# Allegro board RGB24_TO_LVDS.brd
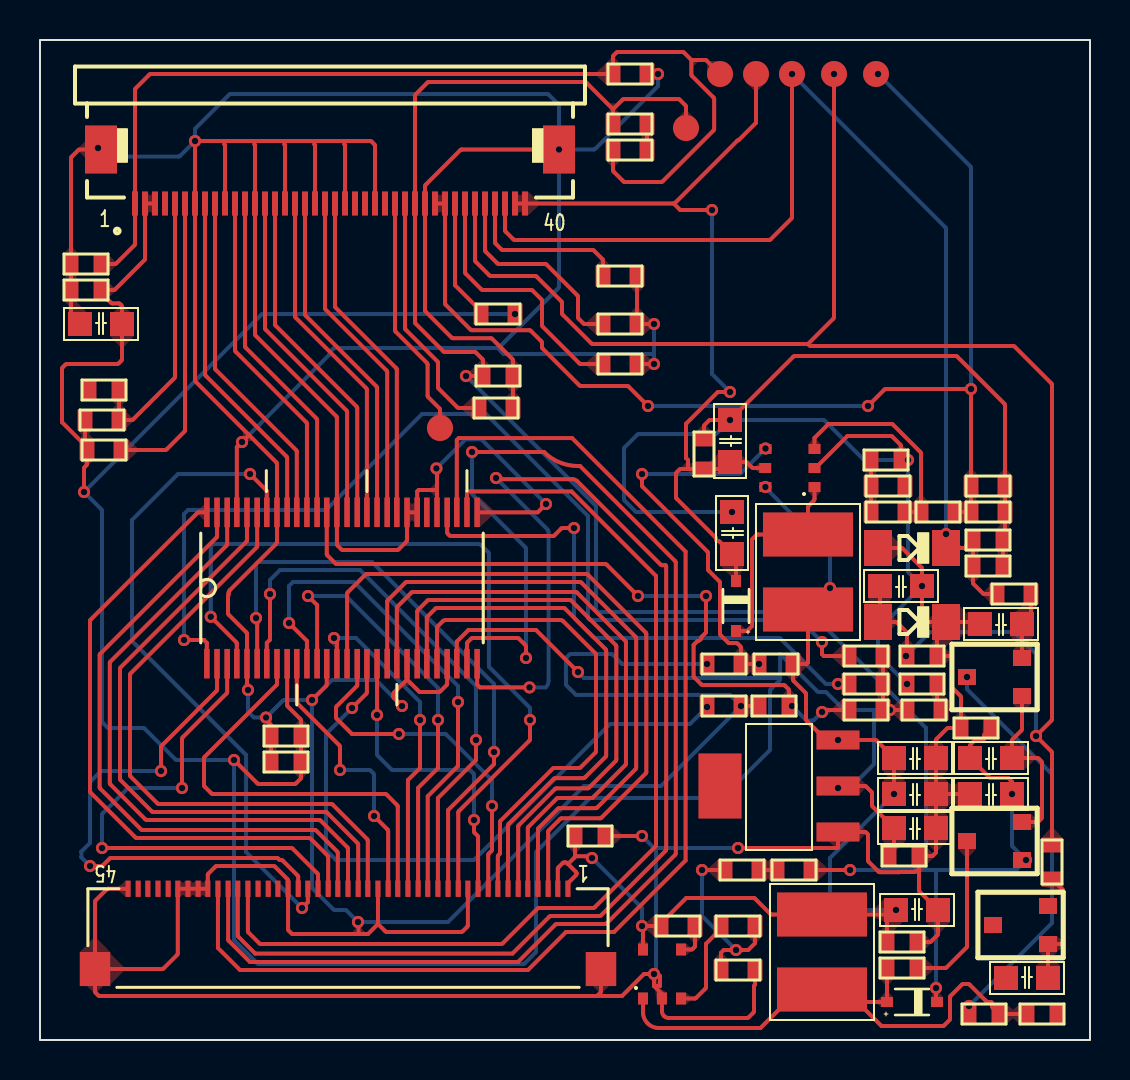
[diagram p0: board, top side]
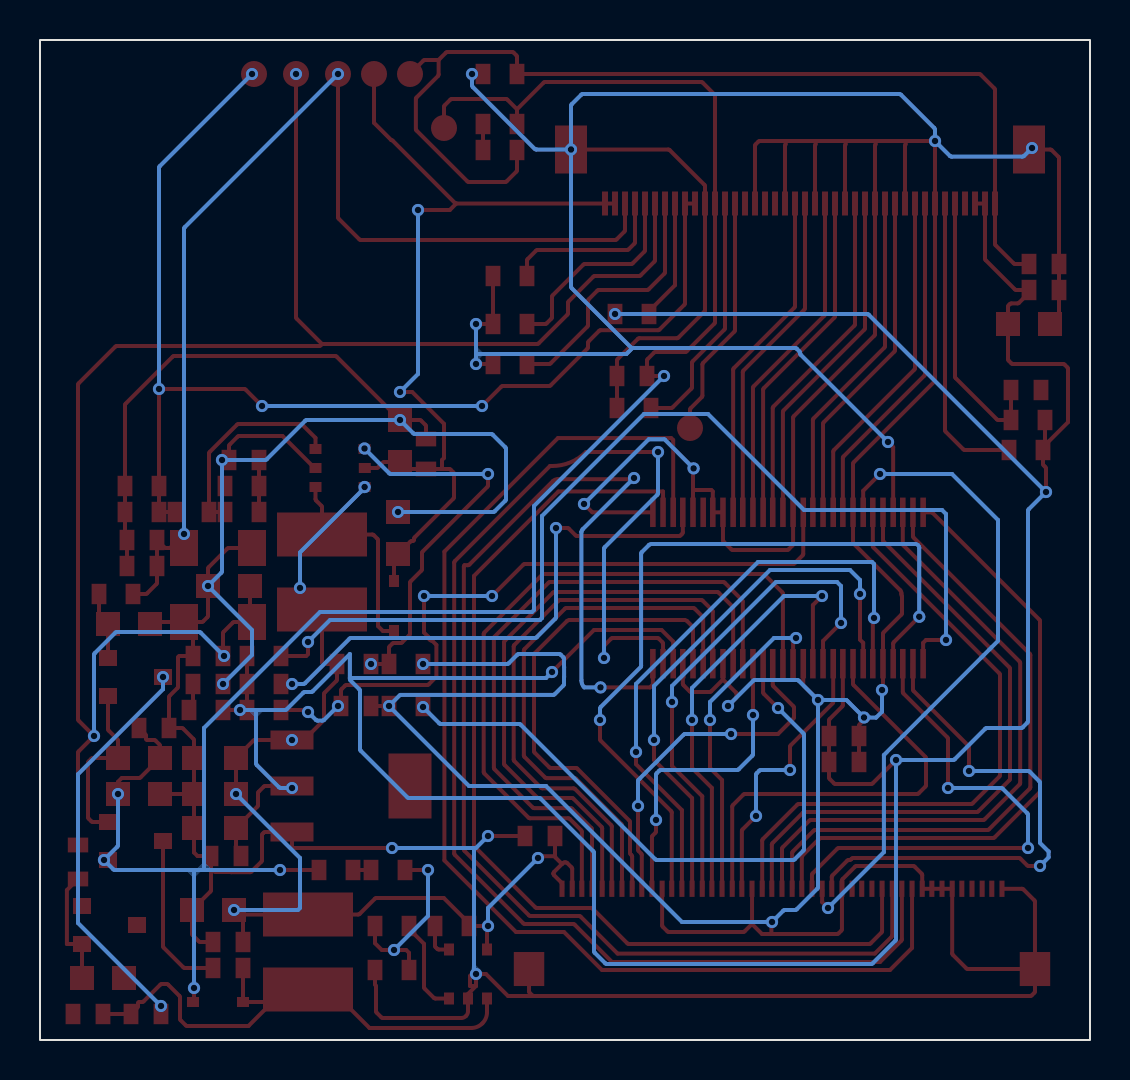
[diagram p1: board, bottom side, seen from below]

Outline 52.5 x 50 mm; copper layers: TOP, BOTTOM. Coordinates in mm from the lower left corner of the outline.
Outline path: rectangle 0,0 52.5,50

## Design rules (mm)
constraint set DEFAULT: 

## Placement (name value [footprint] x y rotation side)
C1  10uF  [CAP_SMD_0805]  4.1 35.8 180 top
C2  100nF  [CAP_SMD_0603]  2.3 37.5 180 top
C3  100nF  [CAP_SMD_0603]  2.3 38.8 180 top
C4  100nF  [CAP_SMD_0603]  3.2 32.5 180 top
C5  100nF  [CAP_SMD_0603]  12.3 15.2 180 top
C6  100nF  [CAP_SMD_0603]  12.3 13.9 180 top
C7  100nF  [CAP_SMD_0603]  44.1 17.8 180 top
C8  100nF  [CAP_SMD_0603]  36.7 16.7 180 top
C9  100nF  [CAP_SMD_0603]  22.9 33.2 0 top
C10  10uF  [CAP_SMD_0805]  42.7 12.3 0 top
C11  100nF  [CAP_SMD_0603]  27.5 10.2 0 top
C12  10uF  [CAP_SMD_0805]  42.7 10.6 0 top
C13  100nF  [CAP_SMD_0603]  43.2 9.2 0 top
C14  10uF  [CAP_SMD_0805]  50.4 3.1 180 top
C15  100nF  [CAP_SMD_0603]  47.2 1.3 180 top
C16  10uF  [CAP_SMD_0805]  42 22.7 0 top
C17  100nF  [CAP_SMD_0603]  44.1 19.2 0 top
C18  100nF  [CAP_SMD_0603]  50.1 1.3 0 top
C19  10uF  [CAP_SMD_0805]  47 20.8 0 top
C20  10uF  [CAP_SMD_0603]  47.4 25 180 top
C21  100nF  [CAP_SMD_0603]  47.4 23.7 180 top
C22  10uF  [CAP_SMD_0805]  42.7 14.1 0 top
C23  10uF  [CAP_SMD_0805]  34.6 24.3 90 top
C24  10uF  [CAP_SMD_0805]  34.5 28.9 90 top
C25  100nF  [CAP_SMD_0603]  43.1 3.6 0 top
C26  10uF  [CAP_SMD_0805]  46.5 14.1 0 top
C27  100nF  [CAP_SMD_0603]  42.3 29 0 top
C28  10uF  [CAP_SMD_0805]  44.9 6.5 180 top
C29  100nF  [CAP_SMD_0603]  43.1 4.9 180 top
C32  10uF  [CAP_SMD_0805]  46.5 12.3 0 top
C33  100nF  [CAP_SMD_0603]  46.8 15.6 0 top
C50  100nF  [CAP_SMD_0603]  33.2 29.3 270 top
D1  BAV99/SOT  [SOT23]  50.4 4.8 270 top
D2  6.8V  [SOD80C]  43.6 20.9 180 top
D3  5819  [SOD323]  34.8 21.7 270 top
D4  BAV99/SOT  [SOT23]  49.1 17.2 270 top
D5  20V  [SOD80C]  43.6 24.6 180 top
D6  BAV99/SOT  [SOT23]  49.1 9 270 top
D7  5819  [SOD323]  43.6 1.9 180 top
J2  nanopi_lcd_bus  [FPC45_0D5]  15.4 7 180 top
L1  4.7uH  [L52X58X45]  38.4 23.4 90 top
L2  -  [L52X58X45]  39.1 4.4 270 top
LCD1  HE070NA-13B-27HB  [FPC40_0D5]  14.5 42.4 180 top
R1  10K  [RES_SMD_0603]  3.2 29.5 180 top
R2  10K  [RES_SMD_0603]  3.1 31 180 top
R3  0R  [RES_SMD_0603]  41.3 16.5 0 top
R4  0R  [RES_SMD_0603]  44.2 16.5 180 top
R5  10K  [RES_SMD_0603]  41.3 19.2 0 top
R6  10K  [RES_SMD_0603]  41.3 17.8 0 top
R7  10K  [RES_SMD_0603]  22.9 36.3 0 top
R8  10K  [RES_SMD_0603]  34.2 16.7 180 top
R9  10K  [RES_SMD_0603]  29 35.8 180 top
R10  10K  [RES_SMD_0603]  29 38.2 180 top
R11  10K  [RES_SMD_0603]  29 33.8 180 top
R12  10K  [RES_SMD_0603]  22.8 31.6 180 top
R13  1.5K  [RES_SMD_0603]  48.7 22.3 180 top
R14  10K  [RES_SMD_0603]  36.8 18.8 0 top
R15  10K  [RES_SMD_0603]  44.9 26.4 180 top
R16  270R  [RES_SMD_0603]  50.6 8.9 90 top
R17  NC  [RES_SMD_0603]  34.2 18.8 180 top
R18  10K  [RES_SMD_0603]  42.4 26.4 0 top
R19  5R  [RES_SMD_0603]  47.4 26.4 180 top
R20  5R  [RES_SMD_0603]  47.4 27.7 180 top
R21  1K  [RES_SMD_0603]  42.4 27.7 0 top
R22  10K  [RES_SMD_0603]  31.9 5.7 0 top
R23  68K 1%  [RES_SMD_0603]  37.7 8.5 180 top
R24  33K 1%  [RES_SMD_0603]  29.5 45.8 180 top
R25  100K  [RES_SMD_0603]  34.9 5.7 180 top
R27  6.2K 1%  [RES_SMD_0603]  29.5 44.5 0 top
R32  10K 1%  [RES_SMD_0603]  35.1 8.5 180 top
R33  10K 1%  [RES_SMD_0603]  34.9 3.5 0 top
R34  18K 1%  [RES_SMD_0603]  29.5 48.3 180 top
TP1  DIMO  [TESTPOINTCIR]  20 30.6 0 top
TP2  VGH  [TESTPOINTCIR]  37.6 48.3 0 top
TP3  VGL  [TESTPOINTCIR]  39.7 48.3 0 top
TP4  AVDD  [TESTPOINTCIR]  32.3 45.6 0 top
TP5  VCOM  [TESTPOINTCIR]  34 48.3 0 top
TP6  LED-  [TESTPOINTCIR]  41.8 48.3 0 top
TP7  LED+  [TESTPOINTCIR]  35.8 48.3 0 top
U1  THC63LVDM83R  [TSSOP56]  15.1 22.6 90 top
U2  AMS1117-3.3  [SOT223]  37 12.6 90 top
U3  RT9293_TSOT-23-6  [SOT23-6]  37.5 28.6 180 top
U4  MP1541DJ_TSOT23-5  [SOT23-5]  31.1 3.3 90 top

## Library data of the parts
C1-C29 C32 C33 C50 = CAPACITOR NON-POL
D1 D4 D6 = BAV99/SOT
D2 D5 = DIODE ZENER
D3 D7 = DIODE_0
J2 = nanopi_lcd_bus_2
L1 = INDUCTOR
L2 = INDUCTOR_L52X58X45_4.7UF
LCD1 = LCD_AT070TNA2_0
R1-R25 R27 R32-R34 = R
TP1-TP7 = T POINT R
U1 = THC63LVDM83R
U2 = ASM1117
U3 = RT9293_TSOT-23-6_0
U4 = MP1541DJ_TSOT23-5

## Footprints (pads in the part's own frame, mm; a bottom-side part is the same pattern mirrored in y, then rotated)
CAP_SMD_0603
  rect 0.74x1.02 smd: 1(-0.75,0) 2(0.75,0)
CAP_SMD_0805
  rect 1.2x1.2 smd: 1(0,0) 2(2.1,0)
FPC40_0D5
  rect 0.3x1.2 smd: 1(9.75,0.575) 2(9.25,0.575) 3(8.75,0.575) 4(8.25,0.575) 5(7.75,0.575) 6(7.25,0.575) 7(6.75,0.575) 8(6.25,0.575) 9(5.75,0.575) 10(5.25,0.575) 11(4.75,0.575) 12(4.25,0.575) 13(3.75,0.575) 14(3.25,0.575) 15(2.75,0.575) 16(2.25,0.575) 17(1.75,0.575) 18(1.25,0.575) 19(0.75,0.575) 20(0.25,0.575) 21(-0.25,0.575) 22(-0.75,0.575) 23(-1.25,0.575) 24(-1.75,0.575) 25(-2.25,0.575) 26(-2.75,0.575) 27(-3.25,0.575) 28(-3.75,0.575) 29(-4.25,0.575) 30(-4.75,0.575) 31(-5.25,0.575) 32(-5.75,0.575) 33(-6.25,0.575) 34(-6.75,0.575) 35(-7.25,0.575) 36(-7.75,0.575) 37(-8.25,0.575) 38(-8.75,0.575) 39(-9.25,0.575) 40(-9.75,0.575)
  rect 1.6x2.4 smd: 41(-11.45,-2.125) 42(11.45,-2.125)
FPC45_0D5
  rect 0.254x0.813 smd: 1(-10.998,-0.562) 2(-10.49,-0.562) 3(-10.008,-0.562) 4(-9.5,-0.562) 5(-8.992,-0.562) 6(-8.509,-0.562) 7(-8.001,-0.562) 8(-7.493,-0.562) 9(-7.01,-0.562) 10(-6.502,-0.562) 11(-5.994,-0.562) 12(-5.512,-0.562) 13(-5.004,-0.562) 14(-4.496,-0.562) 15(-3.988,-0.562) 16(-3.505,-0.562) 17(-2.997,-0.562) 18(-2.489,-0.562) 19(-2.007,-0.562) 20(-1.499,-0.562) 21(-0.991,-0.562) 22(-0.508,-0.562) 23(0,-0.562) 24(0.508,-0.562) 25(0.991,-0.562) 26(1.499,-0.562) 27(2.007,-0.562) 28(2.489,-0.562) 29(2.997,-0.562) 30(3.505,-0.562) 31(3.988,-0.562) 32(4.496,-0.562) 33(5.004,-0.562) 34(5.512,-0.562) 35(5.994,-0.562) 36(6.502,-0.562) 37(7.01,-0.562) 38(7.493,-0.562) 39(8.001,-0.562) 40(8.509,-0.562) 41(8.992,-0.562) 42(9.5,-0.562) 43(10.008,-0.562) 44(10.49,-0.562) 45(10.998,-0.562)
  rect 1.524x1.702 smd: 46(-12.649,3.452) 47(12.649,3.452)
L52X58X45
  rect 2.2x4.5 smd: 1(-1.875,0) 2(1.875,0)
RES_SMD_0603
  rect 0.74x1.02 smd: 1(-0.85,0) 2(0.85,0)
SOD80C
  rect 1.4x1.8 smd: 1(-1.7,0) 2(1.7,0)
SOD323
  rect 0.6x0.5 smd: A(1.25,0) C(-1.25,0)
SOT23
  rect 0.8x0.9 smd: 1(0,0) 2(-1.9,0) 3(-0.95,-2.75)
SOT23-5
  rect 0.6x0.5 smd: 1(-1.225,0.95) 2(-1.225,0) 3(-1.225,-0.95) 4(1.225,-0.95) 5(1.225,0.95)
SOT23-6
  rect 0.6x0.5 smd: 1(-1.225,0.95) 2(-1.225,0) 3(-1.225,-0.95) 4(1.225,-0.95) 5(1.24,0) 6(1.23,0.95)
SOT223
  rect 3.25x2.15 smd: (0.1,3)
  rect 0.95x2.15 smd: 1(-2.201,-2.901) 2(0.099,-2.901) 3(2.399,-2.901)
TESTPOINTCIR
  round 1.3 smd: 1(0,0)
TSSOP56
  rect 1.473x0.279 smd: 1(-3.785,6.756) 2(-3.785,6.248) 3(-3.785,5.74) 4(-3.785,5.258) 5(-3.785,4.75) 6(-3.785,4.242) 7(-3.785,3.759) 8(-3.785,3.251) 9(-3.785,2.743) 10(-3.785,2.261) 11(-3.785,1.753) 12(-3.785,1.245) 13(-3.785,0.762) 14(-3.785,0.254) 15(-3.785,-0.254) 16(-3.785,-0.762) 17(-3.785,-1.245) 18(-3.785,-1.753) 19(-3.785,-2.261) 20(-3.785,-2.743) 21(-3.785,-3.251) 22(-3.785,-3.759) 23(-3.785,-4.242) 24(-3.785,-4.75) 25(-3.785,-5.258) 26(-3.785,-5.74) 27(-3.785,-6.248) 28(-3.785,-6.756) 29(3.785,-6.756) 30(3.785,-6.248) 31(3.785,-5.74) 32(3.785,-5.258) 33(3.785,-4.75) 34(3.785,-4.242) 35(3.785,-3.759) 36(3.785,-3.251) 37(3.785,-2.743) 38(3.785,-2.261) 39(3.785,-1.753) 40(3.785,-1.245) 41(3.785,-0.762) 42(3.785,-0.254) 43(3.785,0.254) 44(3.785,0.762) 45(3.785,1.245) 46(3.785,1.753) 47(3.785,2.261) 48(3.785,2.743) 49(3.785,3.251) 50(3.785,3.759) 51(3.785,4.242) 52(3.785,4.75) 53(3.785,5.258) 54(3.785,5.74) 55(3.785,6.248) 56(3.785,6.756)

## Nets
AVDD: C9.1 C26.1 C32.2 C33.2 D6.1 D7.C(K) LCD1.29 R23.1 R24.2 TP4.1(TP)
GND: C1.2 C2.2 C3.2 C4.2 C5.2 C6.2 C7.2 C8.2 C9.2 C10.2 C11.2 C12.2 C13.2 C14.2 C16.2 C17.2 C19.1 C20.1 C21.1 C22.2 C23.2 C24.2 C27.2 C28.1 C29.1 C32.1 C33.1 C50.1 D1.2 D2.1(CATHODE) D5.2 J2.11 J2.20 J2.29 J2.37 J2.38 J2.39 J2.40 J2.45 J2.46 J2.47 LCD1.7 LCD1.10 LCD1.13 LCD1.16 LCD1.19 LCD1.22 LCD1.25 LCD1.30 LCD1.41 LCD1.42 R8.1 R9.1 R10.1 R11.1 R12.1 R17.2 R19.1 R20.1 R33.2 R34.1 U1.5 U1.13 U1.21 U1.25(TD6) U1.29 U1.33 U1.35 U1.36 U1.43 U1.49 U1.53 U2.1 U3.2 U4.2
VDD_3.3V: C1.1 C2.1 C5.1 C6.1 C12.1 C13.1 LCD1.2 LCD1.3 R1.2 R2.2 R3.2 R4.2 R5.2 R6.2 R7.2 U1.9 U1.26 U2.2(VOUT)
VDD_5V: C10.1 C11.1 C22.1 C28.2 C29.2 J2.1 J2.2 L1.1 L2.1 R14.2 R22.1 U2.3 U3.6 U4.5
HSYNC: J2.35 U1.27
LED+: C23.1 C24.1 C50.2 D3.C(K) LCD1.39 LCD1.40 TP7.1(TP) U3.5(VOUT)
LED-: LCD1.31 LCD1.32 R15.1 R19.2 R20.2 TP6.1(TP)
PD: R6.1 U1.32
PWM: R21.2
RF: R8.2 U1.17
RS: R5.1 U1.1
RX0+: LCD1.9 U1.47
RX0-: LCD1.8 U1.48
RX1+: LCD1.12 U1.45
RX1-: LCD1.11 U1.46
RX2+: LCD1.15 U1.41
RX2-: LCD1.14 U1.42
RX3+: LCD1.21 U1.37
RX3-: LCD1.20 U1.38
RXCLK+: LCD1.18 U1.39
RXCLK-: LCD1.17 U1.40
TP_INT: J2.43
TP_SCL: J2.41
TP_SDA: J2.42
VCLK: J2.36 U1.31
VCOM: C3.1 LCD1.1 R27.1 R34.2 TP5.1(TP)
VD0: J2.3 U1.15
VD1: J2.4 U1.19
VD2: J2.5 U1.20
VD3: J2.6 U1.22
VD4: J2.7 U1.23
VD5: J2.8 U1.24
VD6: J2.9 U1.16
VD7: J2.10 U1.18
VD8: J2.12 U1.4
VD9: J2.13 U1.6
VD10: J2.14 U1.7
VD11: J2.15 U1.11
VD12: J2.16 U1.12
VD13: J2.17 U1.14
VD14: J2.18 U1.8
VD15: J2.19 U1.10
VD16: J2.21 U1.51
VD17: J2.22 U1.52
VD18: J2.23 U1.54
VD19: J2.24 U1.55
VD20: J2.25 U1.56
VD21: J2.26 U1.3
VD22: J2.27 U1.50
VD23: J2.28 U1.2
VDEN: J2.33 U1.30
VGH: C20.2 C21.2 D5.1(CATHODE) LCD1.38 R13.2 TP2.1(TP)
VGL: C16.1 C17.1 D2.2 LCD1.35(VGL) R16.2 TP3.1(TP)
VSYNC: J2.34(VSYNC) U1.28
N161038: LCD1.6 R1.1
N161042: C4.1 LCD1.5 R2.1
N161328: C8.1 R3.1 U1.44
N161374: C7.1 R4.1 U1.34
N161944: LCD1.27 TP1.1(TP)
N162072: LCD1.28 R12.2
N162142: LCD1.33 R7.1
N162182: LCD1.34 R11.2
N162242: LCD1.36 R9.2
N162266: LCD1.37 R10.2
N162654: D3.A L1.2 U3.1
N162904: C19.2 D4.2 R13.1
N163032: R14.1 R17.1 U3.4
N163060: C15.1 C18.1 C25.1 D7.A L2.2 U4.1(SW)
N163164: C14.1 D1.1 R16.1
N163196: R15.2 R18.2 U3.3
N163288: C26.2 D4.1 D6.2
N163502: C27.1 R18.1 R21.1
N163992: R22.2 U4.4
N164052: R25.2 U4.3
N164056: R25.1 R32.2 R33.1
N164064: R24.1 R27.2
N164068: R23.2 R32.1
N1627760: C15.2 D4.3
N1628800: C18.2 D1.3
N1634860: C25.2 D6.3

Pads without a net: J2 30 31 32 44; LCD1 4 23 24 26

## Via types
v1: diameter 0.61, hole 0.33, TOP to BOTTOM, 98 vias

## Routing (per net, layer and track width the routed paths; a pad name or vN(x,y) marks a point on that pad's centre or on a via; arc(x,y) is an arc through that point)
AVDD: length 100.7
  TOP w0.2: 28.65,46.54 27.32,47.87 arc(27.28,47.89) 27.25,47.9 19.44,47.9 arc(19.4,47.89) 19.37,47.87 18.78,47.28 arc(18.76,47.25) 18.75,47.21 LCD1.29 18.75,35.89 arc(18.76,35.85) 18.78,35.82 20.17,34.43 arc(20.2,34.41) 20.24,34.4 21.72,34.4 arc(21.76,34.39) 21.79,34.37 22.12,34.04 arc(22.14,34.01) 22.15,33.97 C9.1 v1(21.3,33.2) ; 28.65,46.54 29.13,47.02 arc(29.17,47.04) 29.2,47.05 31.91,47.05 arc(31.95,47.04) 31.98,47.02 32.27,46.73 arc(32.29,46.7) 32.3,46.66 TP4.1 ; 28.65,46.54 R24.2 ; D7.C 44.8,1.95 v1(44.8,2.6) ; v1(48.6,12.3) 48.6,12.91 48.41,13.1 47.54,13.1 arc(47.5,13.11) 47.47,13.13 C26.1 46.5,14.7 arc(46.51,14.74) 46.53,14.78 46.73,14.97 arc(46.76,14.99) 46.8,15 47.14,15 arc(47.18,15.02) 47.2,15.06 47.2,15.21 arc(47.21,15.25) 47.23,15.28 C33.2 ; v1(40.5,8.5) R23.1
  BOTTOM w0.2: v1(44.8,2.6) 44.8,8.5 ; 44.8,8.5 44.3,8.5 ; 44.8,8.5 48.76,8.5 arc(48.8,8.51) 48.83,8.53 v1(49.3,9) 48.63,9.67 arc(48.61,9.7) 48.6,9.74 v1(48.6,12.3) ; v1(21.3,33.2) 27.8,26.7 27.8,21.5 27.9,21.4 38.5,21.4 44.3,15.6 44.3,8.5 ; 44.3,8.5 v1(40.5,8.5)
GND: length 485
  TOP w0.2: C19.1 46.93,20.87 arc(46.9,20.89) 46.86,20.9 D2.1 ; v1(10.4,17.5) 10.35,17.55 U1.5 10.35,20.31 arc(10.34,20.35) 10.32,20.38 9.43,21.27 arc(9.41,21.3) 9.4,21.34 9.4,22.16 arc(9.4,22.18) 9.41,22.2 arc(9.42,22.24) 9.43,22.29 9.43,22.35 arc(9.44,22.42) 9.49,22.49 11.79,24.79 arc(11.83,24.86) 11.85,24.93 U1.49 11.85,28.81 arc(11.84,28.85) 11.82,28.88 10.45,30.25 ; U1.25 20.36,17.82 arc(20.35,17.78) 20.33,17.74 20.01,17.43 arc(19.98,17.41) 19.94,17.4 19.02,17.4 arc(18.98,17.41) 18.94,17.43 18.35,18.02 ; J2.47 2.75,6.91 arc(2.76,6.95) 2.78,6.98 3.33,7.53 arc(3.36,7.55) 3.4,7.56 J2.45 ; J2.47 2.75,2.43 arc(2.76,2.4) 2.78,2.36 2.91,2.23 arc(2.95,2.21) 2.98,2.2 27.82,2.2 ; J2.47 6.11,3.55 arc(6.15,3.56) 6.18,3.58 6.86,4.26 arc(6.88,4.29) 6.89,4.33 J2.40 J2.39 J2.38 J2.37 8.39,8.25 arc(8.4,8.29) 8.42,8.32 8.77,8.67 arc(8.8,8.69) 8.84,8.7 11.67,8.7 arc(11.71,8.69) 11.74,8.67 12.37,8.04 arc(12.4,8.01) 12.4,7.97 J2.29 12.4,5.54 arc(12.41,5.5) 12.43,5.47 12.57,5.33 arc(12.61,5.31) 12.64,5.3 15.93,5.3 ; U3.2 38.77,28.6 40.37,30.2 42.55,30.2 arc(42.58,30.19) 42.62,30.17 43.02,29.77 arc(43.04,29.73) 43.05,29.7 C27.2 v1(43.4,29) ; 43.95,8.43 43.95,7.49 arc(43.96,7.45) 43.98,7.42 C28.1 44.9,5.32 arc(44.89,5.28) 44.87,5.25 44.55,4.93 arc(44.52,4.91) 44.48,4.9 C29.1 ; 43.95,8.43 C13.2 44.62,9.2 44.8,9.38 C12.2 C10.2 ; 43.95,8.43 43.78,8.43 arc(43.75,8.41) 43.71,8.4 42.95,8.4 42.94,8.39 42,8.39 arc(41.96,8.4) 41.93,8.42 41.43,8.92 arc(41.41,8.95) 41.4,8.99 41.4,10.24 arc(41.39,10.28) 41.37,10.31 41.31,10.37 arc(41.28,10.39) 41.24,10.4 U2.1 39.9,9.62 39.88,9.6 v1(34.9,9.6) ; J2.11 21.39,5.74 arc(21.39,5.7) 21.37,5.67 21.13,5.43 arc(21.1,5.41) 21.06,5.4 17.34,5.4 arc(17.3,5.41) 17.27,5.43 16.9,5.8 16.9,5.8 ; LCD1.22 15.25,44.71 arc(15.24,44.75) 15.22,44.78 15.22,44.95 ; U1.53 9.84,29.64 v1(10.1,29.9) 10.45,30.25 ; 10.72,44.95 9.22,44.95 ; 10.72,44.95 12.22,44.95 ; 10.72,44.95 10.72,44.78 arc(10.74,44.75) 10.75,44.71 LCD1.13 10.75,35.29 arc(10.76,35.25) 10.78,35.22 14.82,31.18 arc(14.84,31.15) 14.85,31.11 U1.43 14.85,24.8 arc(14.85,24.76) 14.88,24.72 15.07,24.53 arc(15.1,24.51) 15.14,24.5 17.86,24.5 arc(17.9,24.51) 17.93,24.53 18.32,24.92 arc(18.34,24.95) 18.35,24.99 U1.36 U1.35 18.86,27.43 18.93,27.5 19.85,27.5 ; 9.22,44.95 v1(7.75,44.95) LCD1.7 7.75,32.99 arc(7.76,32.95) 7.78,32.92 10.45,30.25 ; 9.22,44.95 9.22,44.78 arc(9.24,44.75) 9.25,44.71 LCD1.10 ; LCD1.25 16.75,44.71 arc(16.74,44.75) 16.72,44.78 16.58,44.92 arc(16.55,44.94) 16.51,44.95 15.22,44.95 ; C10.2 C32.1 ; C10.2 C22.2 44.8,14.98 arc(44.81,15.02) 44.83,15.05 45.35,15.57 arc(45.38,15.59) 45.42,15.6 C33.1 46.05,17.13 arc(46.04,17.17) 46.02,17.2 45.63,17.6 arc(45.61,17.63) 45.6,17.67 45.6,19.12 arc(45.58,19.18) 45.52,19.2 C17.2 44.85,20.41 arc(44.86,20.45) 44.88,20.48 D2.1 ; v1(18.1,16.7) 17.7,17.1 arc(17.68,17.13) 17.67,17.17 17.67,17.3 arc(17.68,17.34) 17.7,17.37 18.35,18.02 ; v1(35.05,16.7) C8.2 ; 15.93,5.3 15.93,5.77 arc(15.91,5.8) 15.9,5.84 v1(15.9,5.9) ; 15.93,5.3 16.4,5.3 16.9,5.8 ; R11.1 v1(30.7,33.8) ; J2.20 16.9,5.8 ; 30.7,2.7 31,2.7 31,3.2 30.9,3.3 30.2,3.3 29.1,2.2 27.82,2.2 ; 30.7,2.7 31.1,2.3 U4.2 31.1,1.44 arc(31.13,1.31) 31.2,1.2 arc(31.31,1.13) 31.44,1.1 35.36,1.1 arc(35.4,1.11) 35.43,1.13 35.67,1.37 arc(35.69,1.4) 35.7,1.44 35.7,2.68 arc(35.71,2.71) 35.73,2.74 arc(35.74,2.77) 35.75,2.8 R33.2 ; 30.7,2.7 v1(30.7,3.3) ; v1(11.3,16.12) 11.3,16.04 arc(11.31,16) 11.33,15.97 11.52,15.78 arc(11.54,15.75) 11.55,15.71 C5.2 C6.2 ; R12.1 C9.2 23.65,33.97 arc(23.64,34.01) 23.62,34.04 22.6,35.06 arc(22.57,35.08) 22.53,35.09 20.65,35.09 arc(20.61,35.1) 20.58,35.12 19.28,36.42 arc(19.26,36.45) 19.25,36.49 LCD1.30 19.25,42.69 arc(19.26,42.73) 19.28,42.76 21.02,44.5 arc(21.05,44.52) 21.09,44.52 v1(25.95,44.52) ; J2.46 28.05,2.43 arc(28.04,2.4) 28.02,2.36 27.89,2.23 arc(27.85,2.21) 27.82,2.2 ; 15.22,44.95 13.72,44.95 ; 13.72,44.95 12.22,44.95 ; 13.72,44.95 13.72,44.78 arc(13.74,44.75) 13.75,44.71 LCD1.19 ; C21.1 C20.1 48.22,25.07 arc(48.24,25.1) 48.25,25.14 R19.1 R20.1 48.25,31.74 arc(48.24,31.78) 48.22,31.81 45.86,34.17 arc(45.83,34.19) 45.79,34.2 37.74,34.2 arc(37.7,34.19) 37.67,34.17 v1(34.5,31) 33.52,31 arc(33.48,30.99) 33.45,30.97 33.23,30.75 arc(33.21,30.72) 33.2,30.68 C50.1 ; 19.85,27.5 19.85,28.51 arc(19.84,28.55) v1(19.82,28.58) ; 19.85,27.5 U1.33 ; U1.13 14.34,17.78 arc(14.33,17.74) 14.31,17.71 v1(13.6,17) ; C11.2 v1(30.1,10.2) ; C1.2 1.58,36.22 arc(1.56,36.25) 1.55,36.29 C2.2 C3.2 1.55,44.09 arc(1.56,44.13) 1.58,44.16 1.92,44.5 arc(1.95,44.52) 1.99,44.52 LCD1.42 ; 12.22,44.95 12.22,44.78 arc(12.24,44.75) 12.25,44.71 LCD1.16 ; D5.2 43.06,24.6 arc(43.1,24.59) 43.13,24.57 44.07,23.63 arc(44.09,23.6) 44.1,23.56 v1(44.1,22.7) 44.1,21.21 arc(44.11,21.18) 44.13,21.14 44.34,20.93 arc(44.38,20.91) 44.41,20.9 D2.1 ; U1.29 24.88,26.38 v1(25.3,26.8) ; 18.35,18.02 U1.21 ; v1(30.7,35.8) R9.1 R10.1 ; R34.1 v1(30.9,48.3)
  BOTTOM w0.2: v1(43.35,17.8) 41.9,19.25 41.9,20.5 v1(44.1,22.7) 43.43,23.37 arc(43.41,23.4) 43.4,23.44 v1(43.4,29) 41.24,29 arc(41.2,29.01) 41.17,29.03 39.23,30.97 arc(39.2,30.99) 39.16,31 v1(34.5,31) 33.83,30.33 arc(33.8,30.31) 33.76,30.3 29.94,30.3 arc(29.9,30.29) 29.87,30.27 29.23,29.63 arc(29.21,29.6) 29.2,29.56 29.2,27.04 arc(29.21,27) 29.23,26.97 29.77,26.43 arc(29.8,26.41) 29.84,26.4 v1(34.6,26.4) ; v1(19.82,28.58) 21.28,30.04 22.06,30.04 v1(25.3,26.8) ; v1(10.4,17.5) 10.4,16.42 10.69,16.12 v1(11.3,16.12) 12.15,16.97 arc(12.18,16.99) 12.22,17 v1(13.6,17) ; 30.8,9.6 30.8,3.4 v1(30.7,3.3) ; 30.8,9.6 v1(34.9,9.6) ; 30.8,9.6 30.7,9.6 v1(30.1,10.2) ; v1(13.6,17) 13.6,7.64 arc(13.61,7.6) 13.63,7.57 14.67,6.53 arc(14.7,6.51) 14.74,6.5 15.26,6.5 arc(15.3,6.49) 15.33,6.47 v1(15.9,5.9) 20.4,5.9 27.2,12.7 31.05,12.7 v1(35.05,16.7) 34.52,17.23 arc(34.49,17.25) 34.45,17.25 26.84,17.25 arc(26.8,17.26) 26.77,17.28 26.33,17.73 arc(26.31,17.76) 26.3,17.8 26.3,18.14 26.3,18.15 26.3,18.65 26.3,18.66 26.3,19.06 arc(26.31,19.1) 26.33,19.13 26.47,19.27 arc(26.5,19.29) 26.54,19.3 28.56,19.3 arc(28.6,19.29) 28.63,19.27 29.07,18.83 arc(29.1,18.81) 29.14,18.8 v1(33.35,18.8) ; v1(13.6,17) 14.57,17.97 arc(14.6,17.99) 14.64,18 16.76,18 arc(16.8,17.99) 16.83,17.97 v1(18.1,16.7) ; 30.7,34.3 23.18,34.3 22.88,34.6 ; 30.7,34.3 v1(30.7,33.8) ; 30.7,34.3 v1(30.7,35.8) ; v1(30.9,48.3) 30.9,47.73 arc(30.89,47.69) 30.87,47.66 27.76,44.55 arc(27.73,44.53) 27.69,44.52 v1(25.95,44.52) ; v1(25.95,44.52) 25.95,37.67 arc(25.94,37.63) 25.92,37.6 22.95,34.63 arc(22.92,34.61) 22.88,34.6 ; v1(25.95,44.52) 25.95,46.71 arc(25.94,46.75) 25.92,46.78 25.43,47.27 arc(25.4,47.29) 25.36,47.3 9.53,47.3 arc(9.49,47.29) 9.46,47.27 7.78,45.59 arc(7.76,45.56) 7.75,45.52 v1(7.75,44.95) 7,44.2 arc(6.97,44.18) 6.93,44.17 3.37,44.17 arc(3.33,44.18) 3.3,44.2 v1(2.9,44.6) ; 22.88,34.6 14.74,34.6 arc(14.7,34.59) 14.67,34.57 14.53,34.43 arc(14.51,34.4) 14.5,34.36 14.5,34.34 arc(14.49,34.3) 14.47,34.27 v1(10.1,29.9)
VDD_3.3V: length 164.4
  TOP w0.2: C13.1 42.67,9.42 arc(42.69,9.45) 42.7,9.49 C12.1 41.63,11.67 arc(41.61,11.7) 41.6,11.74 41.6,12.34 arc(41.59,12.38) 41.57,12.41 41.31,12.67 arc(41.28,12.69) 41.24,12.7 U2.2 ; R1.2 2.35,29.64 1.1,30.89 1.1,33.56 arc(1.11,33.6) 1.13,33.63 1.27,33.77 arc(1.3,33.79) 1.34,33.8 3.86,33.8 arc(3.9,33.81) 3.93,33.83 4.07,33.97 arc(4.09,34) 4.1,34.04 C1.1 4.1,36.66 arc(4.09,36.7) 4.07,36.73 4,36.8 arc(3.97,36.82) 3.93,36.83 3.62,36.83 arc(3.58,36.84) 3.55,36.86 3.08,37.33 arc(3.06,37.36) 3.05,37.4 C2.1 3.68,37.5 arc(3.72,37.51) 3.75,37.53 5.22,39 arc(5.24,39.03) 5.25,39.07 LCD1.2 LCD1.3 ; R1.2 2.35,28.8 arc(2.34,28.77) 2.32,28.73 2.23,28.64 arc(2.21,28.61) 2.2,28.57 v1(2.2,27.4) ; R1.2 2.28,29.57 arc(2.26,29.6) 2.25,29.64 R2.2 ; R4.2 v1(42.5,16.5) R3.2 R6.2 R5.2 ; U1.9 12.36,16.75 arc(12.36,16.71) 12.39,16.68 13.02,16.04 arc(13.04,16.01) 13.05,15.97 C5.1 C6.1 13.05,13.13 arc(13.04,13.09) 13.02,13.06 12.79,12.83 arc(12.76,12.81) 12.72,12.8 10.94,12.8 arc(10.9,12.81) 10.87,12.83 v1(9.7,14) ; U1.26 20.84,19.92 21.42,20.5 24.8,20.5 v1(26.9,18.4)
  BOTTOM w0.2: 41.7,16.5 40.24,16.5 arc(40.2,16.51) 40.17,16.53 39.33,17.37 arc(39.3,17.39) 39.26,17.4 38.94,17.4 arc(38.9,17.41) 38.87,17.43 37.01,19.29 37.01,18.1 ; 41.7,16.5 v1(42.5,16.5) ; 41.7,16.5 41.7,13.83 arc(41.69,13.79) 41.67,13.76 40.54,12.63 arc(40.51,12.61) 40.47,12.6 v1(39.9,12.6) ; v1(26.9,18.4) 27.2,18.1 37.01,18.1 ; v1(23.75,36.3) 11.14,36.3 arc(11.1,36.29) 11.07,36.27 v1(2.2,27.4) 3.07,26.53 arc(3.09,26.5) 3.1,26.46 3.1,15.94 arc(3.11,15.9) 3.13,15.87 3.37,15.63 arc(3.4,15.61) 3.44,15.6 5.16,15.6 arc(5.2,15.59) 5.23,15.57 6.77,14.03 arc(6.8,14.01) 6.84,14 v1(9.7,14) 9.7,5.04 arc(9.71,5) 9.73,4.97 10.87,3.83 arc(10.9,3.81) 10.94,3.8 24.16,3.8 arc(24.2,3.81) 24.23,3.83 24.77,4.37 arc(24.79,4.4) 24.8,4.44 24.8,9.36 arc(24.81,9.4) 24.83,9.43 27.47,12.07 arc(27.5,12.09) 27.54,12.1 34.06,12.1 arc(34.1,12.11) 34.13,12.13 36.47,14.47 arc(36.49,14.5) 36.5,14.54 36.5,17.46 arc(36.51,17.5) 36.53,17.53 36.98,17.98 arc(37,18.01) 37.01,18.05 37.01,18.1
VDD_5V: length 57.1
  TOP w0.2: 30.15,5.7 30.15,4.52 ; 30.15,5.7 R22.1 31.05,5.84 32.31,7.1 35.68,7.1 arc(35.72,7.09) 35.75,7.07 36.52,6.3 arc(36.55,6.28) 36.59,6.27 L2.1 42.58,6.27 v1(42.8,6.5) 42.38,6.08 arc(42.36,6.05) 42.35,6.01 C29.2 ; 30.15,5.7 v1(30.1,5.7) ; 26.4,8.8 26.8,8.4 arc(26.82,8.37) 26.83,8.33 26.83,8.31 arc(26.82,8.28) 26.8,8.24 26.43,7.87 arc(26.41,7.84) 26.4,7.8 J2.1 ; 26.4,8.8 26.72,9.12 arc(26.74,9.15) 26.75,9.19 ; 26.4,8.8 26.35,8.85 arc(26.32,8.87) 26.28,8.88 26.21,8.88 arc(26.17,8.87) 26.14,8.85 25.92,8.63 arc(25.9,8.6) 25.89,8.56 J2.2 ; L1.1 38.4,18.88 38.32,18.8 R14.2 37.65,18.03 arc(37.66,17.99) 37.68,17.96 38.27,17.36 arc(38.29,17.33) 38.3,17.29 38.3,16.04 arc(38.31,16) 38.33,15.97 39.3,15 v1(39.9,15) 41.76,15 arc(41.8,14.99) 41.83,14.97 C22.1 v1(42.7,12.3) ; 26.75,9.19 27.51,9.19 v1(27.6,9.1) ; 26.75,9.19 C11.1
  BOTTOM w0.2: v1(39.5,22.6) 39.5,24.38 36.3,27.58 arc(36.28,27.61) v1(36.27,27.65) ; v1(30.1,5.7) 30.1,6.6 v1(27.6,9.1) ; v1(42.7,12.3) 39.5,9.1 39.5,6.6 39.6,6.5 v1(42.8,6.5)
HSYNC: length 70.9
  TOP w0.2: v1(24.3,19.1) 24.3,19.67 arc(24.29,19.71) 24.27,19.74 23.94,20.07 arc(23.91,20.09) 23.87,20.1 21.63,20.1 arc(21.59,20.09) 21.56,20.07 21.38,19.89 arc(21.36,19.85) 21.35,19.82 U1.27 ; J2.35 9.41,5.03 arc(9.41,5) 9.43,4.96 10.5,3.9 23.9,3.9 25.77,5.77 arc(25.8,5.79) 25.84,5.8 28.26,5.8 arc(28.3,5.81) 28.33,5.83 31.76,9.26 arc(31.78,9.29) 31.79,9.33 31.79,23.87 arc(31.78,23.91) 31.76,23.94 27,28.7 26.89,28.7 arc(25.98,28.88) 25.2,29.4 v1(21.6,29.4)
  BOTTOM w0.2: v1(21.6,29.4) 21.6,27.34 arc(21.61,27.3) 21.63,27.27 24.27,24.63 arc(24.29,24.6) 24.3,24.56 v1(24.3,19.1)
LED+: length 44.3
  TOP w0.2: 32.4,28.55 32.4,29 32.3,29.1 32.3,30.81 33.89,32.4 v1(34.5,32.4) ; 32.4,28.55 32.04,28.55 arc(32,28.54) 31.97,28.52 31.83,28.38 arc(31.81,28.35) 31.8,28.31 31.8,27.14 arc(31.81,27.1) 31.83,27.07 33.77,25.13 arc(33.79,25.1) 33.8,25.06 33.8,25.01 arc(33.82,24.97) 33.86,24.95 33.91,24.95 arc(33.95,24.94) 33.98,24.92 C23.1 34.77,24.13 arc(34.79,24.1) 34.8,24.06 D3.C ; 32.4,28.55 C50.2 34.11,28.55 arc(34.15,28.56) 34.18,28.58 C24.1 35.29,28.9 arc(35.32,28.89) 35.36,28.87 35.6,28.63 arc(35.63,28.61) 35.67,28.6 U3.5 ; TP7.1 35.8,45.86 34.94,45 arc(34.9,44.99) 34.87,44.97 31.75,41.85 arc(31.72,41.83) 31.68,41.83 ; LCD1.39 LCD1.40 31.68,41.83 ; 31.68,41.83 32.01,41.5 v1(33.6,41.5)
  BOTTOM w0.2: v1(33.6,41.5) 33.6,33.3 v1(34.5,32.4)
LED-: length 59.1
  TOP w0.2: R15.1 R19.2 R20.2 v1(46.55,32.55) 42.29,32.55 arc(42.25,32.54) 42.22,32.52 v1(41.4,31.7) ; LCD1.31 LCD1.32 20.25,36.84 arc(20.26,36.8) 20.28,36.77 21.53,35.52 arc(21.56,35.5) 21.6,35.49 24.47,35.49 arc(24.51,35.48) 24.54,35.46 25.07,34.93 arc(25.09,34.9) 25.1,34.86 25.1,34.64 arc(25.11,34.6) 25.13,34.57 26.97,32.73 arc(27,32.71) 27.04,32.7 29.36,32.7 arc(29.4,32.69) 29.43,32.67 v1(30.4,31.7)
  BOTTOM w0.2: v1(30.4,31.7) v1(41.4,31.7) ; v1(46.55,32.55) 46.55,43.61 arc(46.54,43.65) 46.52,43.68 v1(41.9,48.3)
PD: length 27.2
  TOP w0.2: v1(26.7,25.6) 26.13,25.6 arc(26.09,25.59) 26.06,25.57 25.72,25.23 arc(25.69,25.21) 25.65,25.2 20.54,25.2 arc(20.5,25.21) 20.47,25.23 20.39,25.31 arc(20.37,25.35) 20.36,25.38 U1.32 ; R6.1 v1(39.9,17.8)
  BOTTOM w0.2: v1(26.7,25.6) 26.7,21.14 arc(26.71,21.1) 26.73,21.07 27.67,20.13 arc(27.7,20.11) 27.74,20.1 36.95,20.1 arc(36.99,20.09) 37.02,20.07 39.26,17.83 arc(39.29,17.81) 39.33,17.8 v1(39.9,17.8)
RF: length 32.6
  TOP w0.2: R8.2 v1(33.35,16.65) ; v1(15.6,16.6) 16.32,17.32 arc(16.34,17.35) 16.34,17.39 U1.17
  BOTTOM w0.2: v1(15.6,16.6) 14.33,15.33 arc(14.31,15.3) 14.3,15.26 14.3,9.54 arc(14.31,9.5) 14.33,9.47 14.77,9.03 arc(14.8,9.01) 14.84,9 21.66,9 arc(21.7,9.01) 21.73,9.03 28.47,15.77 arc(28.5,15.79) 28.54,15.8 32.46,15.8 arc(32.5,15.81) 32.53,15.83 v1(33.35,16.65)
RS: length 52.2
  TOP w0.2: R5.1 39.19,19.2 39.1,19.29 v1(39.1,19.9) ; U1.1 8.34,19.86 8.2,20 v1(7.2,20)
  BOTTOM w0.2: v1(7.2,20) 7.2,26.3 7.4,26.5 14.3,26.5 19.1,31.3 22.3,31.3 27.4,26.2 27.4,21.1 27.5,21 38,21 v1(39.1,19.9)
RX0+: length 17.1
  TOP w0.2: LCD1.9 8.75,33.59 arc(8.76,33.55) 8.78,33.52 12.81,29.49 arc(12.83,29.46) 12.84,29.42 U1.47
RX0-: length 17.1
  TOP w0.2: U1.48 12.36,29.1 arc(12.35,29.14) 12.33,29.17 8.28,33.22 arc(8.26,33.25) 8.25,33.29 LCD1.8
RX1+: length 16.9
  TOP w0.2: U1.45 13.86,31 arc(13.85,31.04) 13.83,31.07 10.28,34.62 arc(10.26,34.65) 10.25,34.69 LCD1.12
RX1-: length 16.9
  TOP w0.2: LCD1.11 9.75,34.49 arc(9.76,34.45) 9.78,34.42 13.32,30.88 arc(13.34,30.85) 13.35,30.81 U1.46
RX2+: length 17.1
  TOP w0.2: LCD1.15 11.75,35.79 arc(11.76,35.75) 11.78,35.72 15.83,31.67 arc(15.85,31.63) 15.86,31.6 U1.41
RX2-: length 17.1
  TOP w0.2: U1.42 15.35,31.4 arc(15.35,31.44) 15.32,31.48 11.28,35.52 arc(11.26,35.55) 11.25,35.59 LCD1.14
RX3+: length 16.7
  TOP w0.2: U1.37 17.84,33.52 arc(17.84,33.55) 17.81,33.59 14.78,36.62 arc(14.76,36.65) 14.75,36.69 LCD1.21
RX3-: length 16.7
  TOP w0.2: U1.38 17.36,33.4 arc(17.35,33.44) 17.33,33.47 14.28,36.52 arc(14.26,36.55) 14.25,36.59 LCD1.20
RXCLK+: length 16.9
  TOP w0.2: U1.39 16.85,32.61 arc(16.84,32.64) 16.82,32.68 13.28,36.22 arc(13.26,36.25) 13.25,36.29 LCD1.18
RXCLK-: length 16.9
  TOP w0.2: LCD1.17 12.75,36.19 arc(12.76,36.15) 12.78,36.12 16.32,32.58 arc(16.34,32.55) 16.34,32.51 U1.40
VCLK: length 62
  TOP w0.2: J2.36 8.9,4.6 10,3.5 24.4,3.5 26.3,5.4 28.7,5.4 32.28,8.98 32.28,24.42 26.6,30.1 20.94,30.1 20.84,30 U1.31
VCOM: length 52.2
  TOP w0.2: C3.1 3.74,38.8 arc(3.78,38.81) 3.81,38.83 4.72,39.74 arc(4.74,39.77) 4.75,39.81 LCD1.1 4.75,47.51 arc(4.76,47.55) 4.78,47.58 5.47,48.27 arc(5.5,48.29) 5.54,48.3 R34.2 28.65,49.16 arc(28.66,49.2) 28.68,49.23 28.82,49.37 arc(28.85,49.39) 28.89,49.4 32.13,49.4 arc(32.17,49.39) 32.2,49.37 32.57,49 ; 32.57,49 32.57,48.27 arc(32.58,48.23) 32.6,48.2 33.68,47.12 arc(33.7,47.09) 33.71,47.05 33.71,45.55 arc(33.7,45.51) 33.68,45.48 31.13,42.93 arc(31.1,42.91) 31.06,42.9 29.24,42.9 arc(29.2,42.91) 29.17,42.93 28.68,43.42 arc(28.66,43.45) 28.65,43.49 R27.1 ; 32.57,49 33.26,49 arc(33.3,48.99) 33.33,48.97 TP5.1
VD0: length 36.1
  TOP w0.2: U1.15 15.35,22.31 arc(15.36,22.35) 15.38,22.38 16.27,23.27 arc(16.3,23.29) 16.34,23.3 27.32,23.3 arc(27.35,23.29) 27.39,23.27 30.29,20.37 arc(30.31,20.34) 30.31,20.3 30.31,13.4 arc(30.31,13.36) 30.29,13.33 28.07,11.11 arc(28.04,11.09) 28,11.09 26.08,11.09 arc(26.05,11.08) 26.01,11.06 25.44,10.48 arc(25.42,10.45) 25.41,10.41 J2.3
VD1: length 32.8
  TOP w0.2: U1.19 17.36,21.92 arc(17.37,21.96) 17.39,21.99 18.27,22.87 arc(18.3,22.89) 18.34,22.9 27,22.9 arc(27.03,22.89) 27.07,22.87 29.78,20.16 arc(29.8,20.13) 29.81,20.09 29.81,13.61 arc(29.8,13.57) 29.78,13.54 27.86,11.62 arc(27.83,11.6) 27.79,11.59 25.96,11.59 arc(25.93,11.59) 25.89,11.56 24.93,10.6 arc(24.91,10.57) 24.9,10.53 J2.4
VD2: length 31
  TOP w0.2: U1.20 17.84,21.6 arc(17.85,21.64) 17.87,21.67 18.57,22.37 arc(18.6,22.39) 18.64,22.4 26.78,22.4 arc(26.82,22.39) 26.85,22.37 29.27,19.95 arc(29.29,19.92) 29.3,19.88 29.3,13.82 arc(29.29,13.78) 29.27,13.75 27.65,12.13 arc(27.62,12.11) 27.58,12.1 25.91,12.1 arc(25.87,12.09) 25.84,12.07 24.42,10.66 arc(24.4,10.63) 24.39,10.59 J2.5
VD3: length 28.9
  TOP w0.2: J2.6 23.91,10.67 arc(23.92,10.71) 23.94,10.74 25.75,12.55 arc(25.78,12.58) 25.82,12.58 27.38,12.58 arc(27.42,12.59) 27.45,12.61 28.79,13.95 arc(28.81,13.98) 28.82,14.02 28.82,19.68 arc(28.81,19.72) 28.79,19.75 26.57,21.97 arc(26.53,21.99) 26.5,22 19.44,22 arc(19.4,21.99) 19.37,21.97 18.89,21.49 arc(18.87,21.46) 18.86,21.42 U1.22
VD4: length 27.2
  TOP w0.2: J2.7 23.4,10.73 arc(23.41,10.77) 23.43,10.8 25.69,13.06 arc(25.73,13.08) 25.76,13.09 27.17,13.09 arc(27.21,13.1) 27.24,13.12 28.28,14.16 arc(28.3,14.19) 28.31,14.23 28.31,19.47 arc(28.3,19.51) 28.28,19.54 26.25,21.57 arc(26.22,21.59) 26.18,21.6 19.84,21.6 arc(19.8,21.59) 19.77,21.57 19.37,21.17 arc(19.35,21.14) 19.34,21.1 U1.23
VD5: length 25.1
  TOP w0.2: U1.24 19.85,20.61 arc(19.86,20.65) 19.88,20.68 20.14,20.94 arc(20.21,20.98) 20.28,21 26.02,21 arc(26.09,20.98) 26.16,20.94 27.77,19.33 arc(27.79,19.3) 27.8,19.26 27.8,14.44 arc(27.79,14.4) 27.77,14.37 27.03,13.63 arc(27,13.61) 26.96,13.6 25.71,13.6 arc(25.67,13.59) 25.64,13.57 23.03,10.96 arc(23.01,10.93) 23,10.89 23,9.36 arc(22.99,9.32) 22.97,9.29 22.92,9.24 arc(22.9,9.21) 22.89,9.17 J2.8
VD6: length 17.7
  TOP w0.2: v1(17.94,15.3) 15.6,15.3 14.83,16.07 arc(14.81,16.1) 14.8,16.14 14.8,16.61 arc(14.81,16.65) 14.83,16.68 15.83,17.69 arc(15.85,17.72) 15.86,17.76 U1.16 ; v1(22.6,11.7) 22.6,9.52 arc(22.59,9.48) 22.57,9.45 22.44,9.32 arc(22.42,9.29) 22.41,9.25 J2.9
  BOTTOM w0.2: v1(22.6,11.7) 22.6,12.94 arc(22.59,12.98) 22.57,13.01 20.31,15.27 arc(20.28,15.29) 20.24,15.3 v1(17.94,15.3)
VD7: length 15.6
  TOP w0.2: U1.18 16.85,16.25 v1(16.85,16.25) ; J2.10 21.9,10.15 arc(21.89,10.18) 21.87,10.22 21.73,10.36 arc(21.71,10.39) 21.7,10.43 v1(21.7,11)
  BOTTOM w0.2: v1(21.7,11) 21.7,13.26 arc(21.69,13.3) 21.67,13.33 21.53,13.47 arc(21.5,13.49) 21.46,13.5 17.64,13.5 arc(17.6,13.51) 17.57,13.53 16.88,14.22 arc(16.86,14.25) 16.85,14.29 v1(16.85,16.25)
VD8: length 39.6
  TOP w0.2: U1.4 9.84,19.82 arc(9.83,19.85) 9.81,19.89 v1(8.54,21.16) ; v1(24.5,16) 24.5,15.04 arc(24.49,15) 24.47,14.97 20.94,11.44 arc(20.92,11.41) 20.91,11.37 J2.12
  BOTTOM w0.2: v1(24.5,16) 24.5,16.57 arc(24.49,16.61) 24.47,16.64 22.47,18.64 arc(22.45,18.67) 22.45,18.71 22.45,24.31 arc(22.44,24.35) 22.42,24.38 22.06,24.74 arc(21.99,24.78) 21.92,24.8 8.74,24.8 arc(8.6,24.74) 8.54,24.6 v1(8.54,21.16)
VD9: length 30.7
  TOP w0.2: v1(10.8,21.1) 10.86,21.04 U1.6 ; v1(22.7,14.4) 22.7,13.79 20.4,11.49 J2.13
  BOTTOM w0.2: v1(22.7,14.4) 22.7,17.8 16.6,23.9 10.9,23.9 10.8,23.8 v1(10.8,21.1)
VD10: length 28.1
  TOP w0.2: J2.14 19.9,12.1 21.8,14 v1(21.8,15) ; v1(11.5,22.3) 11.5,20.02 11.34,19.86 U1.7
  BOTTOM w0.2: v1(11.5,22.3) 11.5,23 12,23.5 16,23.5 21.8,17.7 v1(21.8,15)
VD11: length 25.7
  TOP w0.2: U1.11 13.35,19.95 v1(12.45,20.85) ; v1(20.9,16.9) 20.9,13.7 19.39,12.19 J2.15
  BOTTOM w0.2: v1(20.9,16.9) 20.9,17.7 15.7,22.9 12.65,22.9 12.45,22.7 v1(12.45,20.85)
VD12: length 22.4
  TOP w0.2: J2.16 18.91,12.61 19.9,13.6 v1(19.9,16) ; U1.12 13.86,21.74 v1(13.4,22.2)
  BOTTOM w0.2: v1(19.9,16) 19.9,17.6 15.3,22.2 v1(13.4,22.2)
VD13: length 16.6
  TOP w0.2: v1(14.7,20.1) 14.85,19.95 U1.14 ; v1(19,16) 19,13.6 18.4,13 J2.17
  BOTTOM w0.2: v1(19,16) 19,16.9 15.8,20.1 v1(14.7,20.1)
VD14: length 21.8
  TOP w0.2: J2.18 17.89,11.67 arc(17.88,11.71) 17.86,11.74 17.33,12.27 arc(17.3,12.29) 17.26,12.3 8.64,12.3 arc(8.6,12.31) 8.57,12.33 8.23,12.67 arc(8.21,12.7) 8.2,12.74 8.2,14.08 arc(8.21,14.12) 8.23,14.15 11.82,17.74 arc(11.84,17.78) 11.85,17.82 U1.8
VD15: length 14
  TOP w0.2: v1(16.7,11.2) 17.38,10.52 arc(17.4,10.49) 17.41,10.45 J2.19 ; v1(15,13.5) 15,14.66 arc(14.99,14.7) 14.97,14.73 12.87,16.83 arc(12.85,16.86) 12.84,16.9 U1.10
  BOTTOM w0.2: v1(16.7,11.2) 16.7,13.26 arc(16.69,13.3) 16.67,13.33 16.53,13.47 arc(16.5,13.49) 16.46,13.5 v1(15,13.5)
VD16: length 31.5
  TOP w0.2: U1.51 10.86,24.7 arc(10.85,24.66) 10.83,24.63 4.53,18.33 arc(4.51,18.3) 4.5,18.26 4.5,13.24 arc(4.51,13.21) 4.53,13.17 5.87,11.83 arc(5.91,11.81) 5.94,11.8 14.56,11.8 arc(14.6,11.79) 14.63,11.77 16.36,10.04 arc(16.38,10.01) 16.39,9.97 J2.21
VD17: length 31.5
  TOP w0.2: J2.22 15.91,9.77 arc(15.9,9.81) 15.88,9.84 14.35,11.37 arc(14.32,11.39) 14.28,11.4 5.66,11.4 arc(5.62,11.41) 5.59,11.43 4.03,12.99 arc(4.01,13.02) 4,13.06 4,18.56 arc(4.01,18.6) 4.03,18.63 10.32,24.92 arc(10.34,24.95) 10.35,24.99 U1.52
VD18: length 31.3
  TOP w0.2: J2.23 15.4,9.56 arc(15.39,9.6) 15.37,9.63 14.03,10.97 arc(14,10.99) 13.96,11 5.34,11 arc(5.3,11.01) 5.27,11.03 3.52,12.78 arc(3.5,12.81) 3.49,12.85 3.49,18.85 arc(3.5,18.89) 3.52,18.92 9.33,24.73 arc(9.35,24.76) 9.36,24.8 U1.54
VD19: length 31.3
  TOP w0.2: J2.24 14.89,9.35 arc(14.88,9.39) 14.86,9.42 13.81,10.47 arc(13.78,10.49) 13.74,10.5 5.12,10.5 arc(5.09,10.51) 5.05,10.53 3.01,12.57 arc(2.99,12.6) 2.98,12.64 2.98,19.24 arc(2.99,19.28) 3.01,19.31 8.82,25.12 arc(8.84,25.15) 8.85,25.19 U1.55
VD20: length 31.5
  TOP w0.2: U1.56 7.94,26.38 arc(7.9,26.38) 7.87,26.36 2.53,21.01 arc(2.51,20.98) 2.5,20.94 2.5,12.44 arc(2.51,12.4) 2.53,12.37 4.77,10.13 arc(4.8,10.11) 4.84,10.1 13.46,10.1 arc(13.5,10.09) 13.53,10.07 14.38,9.22 arc(14.4,9.19) 14.41,9.15 J2.25
VD21: length 25.4
  TOP w0.2: J2.26 13.9,8.26 arc(13.89,8.3) 13.87,8.33 12.63,9.57 arc(12.6,9.59) 12.56,9.6 v1(3.1,9.6) ; U1.3 9.36,17.4 arc(9.35,17.36) 9.33,17.33 7.13,15.13 arc(7.11,15.1) 7.1,15.06 v1(7.1,12.6)
  BOTTOM w0.2: v1(3.1,9.6) 3.1,11.26 arc(3.11,11.3) 3.13,11.33 4.37,12.57 arc(4.4,12.59) 4.44,12.6 v1(7.1,12.6)
VD22: length 33.1
  TOP w0.2: U1.50 11.34,27.46 v1(10.5,28.3) ; J2.27 13.39,6.89 v1(13.1,6.6)
  BOTTOM w0.2: v1(13.1,6.6) 10.3,9.4 10.3,14.25 4.6,19.96 4.6,26 6.9,28.3 v1(10.5,28.3)
VD23: length 26.4
  TOP w0.2: J2.28 12.91,8.15 arc(12.9,8.19) 12.88,8.22 12.14,8.97 arc(12.1,8.99) 12.06,9 12.02,9 arc(11.98,9.01) 11.95,9.03 11.91,9.07 arc(11.88,9.09) 11.84,9.1 3.55,9.1 arc(3.51,9.09) 3.48,9.07 3.14,8.73 arc(3.11,8.71) 3.07,8.7 v1(2.5,8.7) ; U1.2 8.85,17.52 arc(8.84,17.49) 8.82,17.45 6.08,14.71 arc(6.06,14.68) 6.05,14.64 v1(6.05,13.45)
  BOTTOM w0.2: v1(6.05,13.45) 3.09,13.45 arc(3.05,13.44) 3.02,13.42 2.53,12.93 arc(2.51,12.9) 2.5,12.86 2.5,9.86 2.07,9.42 2.07,9.13 v1(2.5,8.7)
VDEN: length 50.6
  TOP w0.2: J2.33 10.4,5.45 arc(10.4,5.41) 10.43,5.37 10.97,4.83 arc(11,4.81) 11.04,4.8 23.06,4.8 arc(23.1,4.81) 23.13,4.83 24.87,6.57 arc(24.9,6.59) 24.94,6.6 27.66,6.6 arc(27.7,6.61) 27.73,6.63 30.77,9.67 arc(30.79,9.7) 30.8,9.74 30.8,23.2 26.58,27.43 21.35,27.43 U1.30
VGH: length 55.1
  TOP w0.2: LCD1.38 23.25,40.49 arc(23.26,40.45) 23.28,40.42 23.67,40.03 arc(23.7,40.01) 23.74,40 36.46,40 arc(36.5,40.01) 36.53,40.03 37.57,41.07 arc(37.59,41.1) 37.6,41.14 v1(37.6,48.3) ; R13.2 47.22,22.3 arc(47.18,22.31) 47.15,22.33 46.68,22.8 arc(46.66,22.83) 46.65,22.87 C21.2 C20.2 46.28,24.63 arc(46.25,24.61) 46.21,24.6 46,24.6 v1(45.3,25.3)
  BOTTOM w0.2: v1(45.3,25.3) 45.3,40.56 arc(45.29,40.6) 45.27,40.63 v1(37.6,48.3)
VGL: length 88.5
  TOP w0.2: R16.2 50.6,14.36 arc(50.59,14.4) 50.57,14.43 v1(49.8,15.2) 50.57,15.97 arc(50.59,16) 50.6,16.04 50.6,32.76 arc(50.59,32.8) 50.57,32.83 48.73,34.67 arc(48.7,34.69) 48.66,34.7 38.54,34.7 arc(38.5,34.71) 38.47,34.73 38.4,34.8 ; C17.1 43.35,20.34 arc(43.34,20.37) 43.32,20.41 42.86,20.87 arc(42.82,20.89) 42.79,20.9 D2.2 41.97,20.97 arc(41.99,21) 42,21.04 C16.1 ; LCD1.35 21.75,38.99 arc(21.76,38.95) 21.78,38.92 22.47,38.23 arc(22.5,38.21) 22.54,38.2 24.76,38.2 arc(24.8,38.19) 24.83,38.17 26.07,36.93 arc(26.09,36.9) 26.1,36.86 26.1,36.34 arc(26.11,36.3) 26.13,36.27 27.57,34.83 arc(27.6,34.81) 27.64,34.8 38.4,34.8 ; 38.4,34.8 39.67,36.07 arc(39.69,36.1) 39.7,36.14 v1(39.7,48.3)
  BOTTOM w0.2: v1(49.8,15.2) 49.8,19.26 arc(49.79,19.3) 49.77,19.33 48.73,20.37 arc(48.7,20.39) 48.66,20.4 44.54,20.4 arc(44.5,20.39) 44.47,20.37 v1(43.3,19.2)
VSYNC: length 66.9
  TOP w0.2: v1(24.48,17.63) 22,17.63 21.86,17.77 U1.28 ; J2.34 9.89,5.23 arc(9.9,5.2) 9.92,5.16 10.76,4.32 23.62,4.32 25.47,6.17 arc(25.5,6.19) 25.54,6.2 27.98,6.2 arc(28.02,6.21) 28.05,6.23 31.28,9.46 arc(31.3,9.49) 31.31,9.53 31.31,23.67 arc(31.3,23.71) 31.28,23.74 31.1,23.74 arc(31.06,23.75) 31.03,23.77 26.86,27.94 arc(26.75,28.02) 26.62,28.04 22.94,28.04 arc(22.86,28.06) v1(22.8,28.1)
  BOTTOM w0.2: v1(22.8,28.1) 25.37,25.53 arc(25.41,25.46) 25.43,25.39 25.43,17.97 arc(25.39,17.79) 25.29,17.63 v1(24.48,17.63)
N161038: length 15
  TOP w0.2: R1.1 6.26,29.5 arc(6.3,29.51) 6.33,29.53 7.22,30.42 arc(7.24,30.45) 7.25,30.49 LCD1.6
N161042: length 13.9
  TOP w0.2: C4.1 R2.1 4.58,31 arc(4.62,31.01) 4.65,31.03 6.72,33.1 arc(6.74,33.13) 6.75,33.17 LCD1.5
N161328: length 35.6
  TOP w0.2: U1.44 14.34,24.3 arc(14.35,24.27) 14.37,24.23 14.77,23.83 arc(14.8,23.81) 14.84,23.8 28.26,23.8 arc(28.3,23.79) 28.33,23.77 v1(29.9,22.2) ; v1(33.3,22.2) 33.3,20.37 33.08,20.15 arc(33.02,20.01) 32.88,19.95 32.68,19.75 32.68,18.17 33.07,17.78 arc(33.1,17.76) 33.14,17.75 37.17,17.75 arc(37.21,17.74) 37.24,17.72 37.42,17.54 arc(37.44,17.51) 37.45,17.47 C8.1 v1(37.6,16.7) ; v1(39.1,16.4) 39.17,16.47 arc(39.2,16.49) 39.24,16.5 R3.1
  BOTTOM w0.2: v1(39.1,16.4) 38.7,16 arc(38.67,15.98) 38.63,15.97 38.37,15.97 arc(38.33,15.98) 38.3,16 v1(37.6,16.7) ; v1(29.9,22.2) v1(33.3,22.2)
N161374: length 1.4
  TOP w0.2: R4.1 44.88,16.67 arc(44.86,16.7) 44.85,16.74 C7.1
N161944: length 12.1
  TOP w0.2: TP1.1 20,31.51 arc(19.99,31.55) 19.97,31.58 19.41,32.15 arc(19.39,32.18) 19.38,32.22 19.38,33.78 arc(19.37,33.82) 19.35,33.85 17.78,35.42 arc(17.76,35.45) 17.75,35.49 LCD1.27
N162072: length 12.4
  TOP w0.2: LCD1.28 18.25,35.59 arc(18.26,35.55) 18.28,35.52 19.87,33.93 arc(19.89,33.9) 19.9,33.86 19.9,32.64 arc(19.91,32.6) 19.93,32.57 20.87,31.63 arc(20.9,31.61) 20.94,31.6 R12.2
N162142: length 6.1
  TOP w0.2: LCD1.33 20.75,37.74 22.05,36.44 R7.1
N162182: length 13
  TOP w0.2: R11.2 27.04,33.8 arc(27,33.81) 26.97,33.83 25.13,35.67 arc(25.11,35.7) 25.1,35.74 25.1,36.96 arc(25.09,37) 25.07,37.03 24.63,37.47 arc(24.6,37.49) 24.56,37.5 22.14,37.5 arc(22.1,37.51) 22.07,37.53 21.28,38.32 arc(21.26,38.35) 21.25,38.39 LCD1.34
N162242: length 10.4
  TOP w0.2: R9.2 27.24,35.8 arc(27.2,35.81) 27.17,35.83 26.93,36.07 arc(26.91,36.1) 26.9,36.14 26.9,37.16 arc(26.89,37.2) 26.87,37.23 25.33,38.77 arc(25.3,38.79) 25.26,38.8 22.94,38.8 arc(22.9,38.81) 22.87,38.83 22.28,39.42 arc(22.26,39.45) 22.25,39.49 LCD1.36
N162266: length 8.5
  TOP w0.2: R10.2 28.15,38.97 arc(28.14,39.01) 28.12,39.04 27.69,39.47 arc(27.66,39.49) 27.62,39.5 23.14,39.5 arc(23.1,39.51) 23.07,39.53 22.78,39.82 arc(22.76,39.85) 22.75,39.89 LCD1.37
N162654: length 10.6
  TOP w0.2: U3.1 38.73,27.05 arc(38.72,27.01) 38.7,26.98 38.43,26.71 arc(38.41,26.68) 38.4,26.64 38.4,25.27 35.89,25.27 arc(35.85,25.27) 35.82,25.25 35.63,25.06 arc(35.61,25.03) 35.6,24.99 35.6,20.7 35.35,20.45 D3.A
N162904: length 3.4
  TOP w0.2: D4.2 C19.2 49.52,21.22 arc(49.54,21.25) 49.55,21.29 R13.1
N163032: length 19.4
  TOP w0.2: U3.4 v1(36.27,29.57) ; v1(30.1,28.3) 30.1,27.73 arc(30.11,27.69) 30.13,27.66 33.37,24.42 arc(33.39,24.39) 33.4,24.35 33.4,23.54 arc(33.41,23.5) 33.43,23.47 33.97,22.93 arc(33.99,22.9) 34,22.86 34,20.32 arc(34.01,20.28) 34.03,20.25 34.4,19.88 arc(34.43,19.86) 34.47,19.85 34.81,19.85 arc(34.85,19.84) 34.88,19.82 35.02,19.68 arc(35.04,19.65) 35.05,19.61 R17.1 v1(35.95,18.8)
  BOTTOM w0.2: v1(30.1,28.3) 34.96,28.3 arc(35,28.31) 35.03,28.33 v1(36.27,29.57)
N163060: length 29.4
  TOP w0.2: C18.1 C15.1 47.63,1.62 arc(47.61,1.65) 47.6,1.69 47.6,1.84 arc(47.58,1.88) 47.54,1.9 47.39,1.9 arc(47.35,1.91) 47.32,1.93 46.48,2.77 arc(46.45,2.79) 46.41,2.8 46.17,2.8 arc(46.13,2.79) 46.09,2.77 45.53,2.21 arc(45.51,2.17) 45.5,2.14 45.5,1.06 arc(45.49,1.02) 45.47,0.99 45.21,0.73 arc(45.18,0.71) 45.14,0.7 42.08,0.7 40.25,2.52 L2.2 ; L2.2 39.7,1.93 arc(39.73,1.91) 39.77,1.9 D7.A C25.1 ; L2.2 37.95,2.52 36.02,0.6 30.94,0.6 arc(30.64,0.66) 30.38,0.83 arc(30.21,1.09) 30.15,1.39 U4.1
N163164: length 5.9
  TOP w0.2: C14.1 D1.1 51.15,4.8 51.15,7.5 R16.1
N163196: length 10.5
  TOP w0.2: R18.2 R15.2 44.05,29.32 arc(44.04,29.36) 44.02,29.39 42.64,30.77 arc(42.61,30.79) 42.57,30.8 39.42,30.8 38.73,30.1 38.73,29.55
N163288: length 8.7
  TOP w0.2: D4.1 49.1,15.55 arc(49.09,15.51) 49.07,15.48 48.63,15.03 arc(48.61,15) 48.6,14.96 C26.2 49.86,14.1 arc(49.9,14.09) 49.93,14.07 50.07,13.93 arc(50.09,13.9) 50.1,13.86 50.1,11.14 arc(50.09,11.1) 50.07,11.07 49.93,10.93 arc(49.9,10.91) 49.86,10.9 D6.2
N163502: length 2.6
  TOP w0.2: R18.1 R21.1 C27.1
N163992: length 1.8
  TOP w0.2: R22.2 32.75,4.71 arc(32.74,4.67) 32.72,4.64 32.63,4.55 arc(32.6,4.53) 32.56,4.52 32.05,4.52
N164052: length 4.9
  TOP w0.2: U4.3 32.73,2.07 arc(32.77,2.08) 32.8,2.1 33.27,2.57 arc(33.29,2.6) 33.3,2.64 33.3,4.81 34.05,5.56 R25.2
N164056: length 9.5
  TOP w0.2: R32.2 v1(33.1,8.5) ; R33.1 34.05,4.36 34.19,4.5 v1(34.8,4.5) 35.41,4.5 35.75,4.84 R25.1
  BOTTOM w0.2: v1(33.1,8.5) 33.1,6.2 v1(34.8,4.5)
N164064: length 1.3
  TOP w0.2: R24.1 R27.2
N164068: length 0.9
  TOP w0.2: R32.1 R23.2
N1627760: length 19.9
  BOTTOM w0.2: v1(46.45,1.7) 50.6,5.85 50.6,13.29 46.35,17.54 v1(46.35,18.15)
N1634860: length 8.2
  TOP w0.2: C25.2 45.26,3.6 arc(45.3,3.61) 45.33,3.63 46.32,4.62 arc(46.34,4.65) 46.35,4.69 D6.3

Small or netless copper shapes (teardrops, artwork), in the pictures only: 417 on TOP, 113 on BOTTOM
